# Altium PCB senoko_pvt1.PcbDoc (part 3 of 3)
Units mil, origin at the board's own origin, x right, y up, seen from the top; angles counter-clockwise.
Board outline 4901.58 x 1614.17 mil, 4 copper layers (Top Layer, Internal Plane 1, Internal Plane 2, Bottom Layer), stack 65.8 mil thick; 226 components, 139 nets, 941 pads, 366 vias.
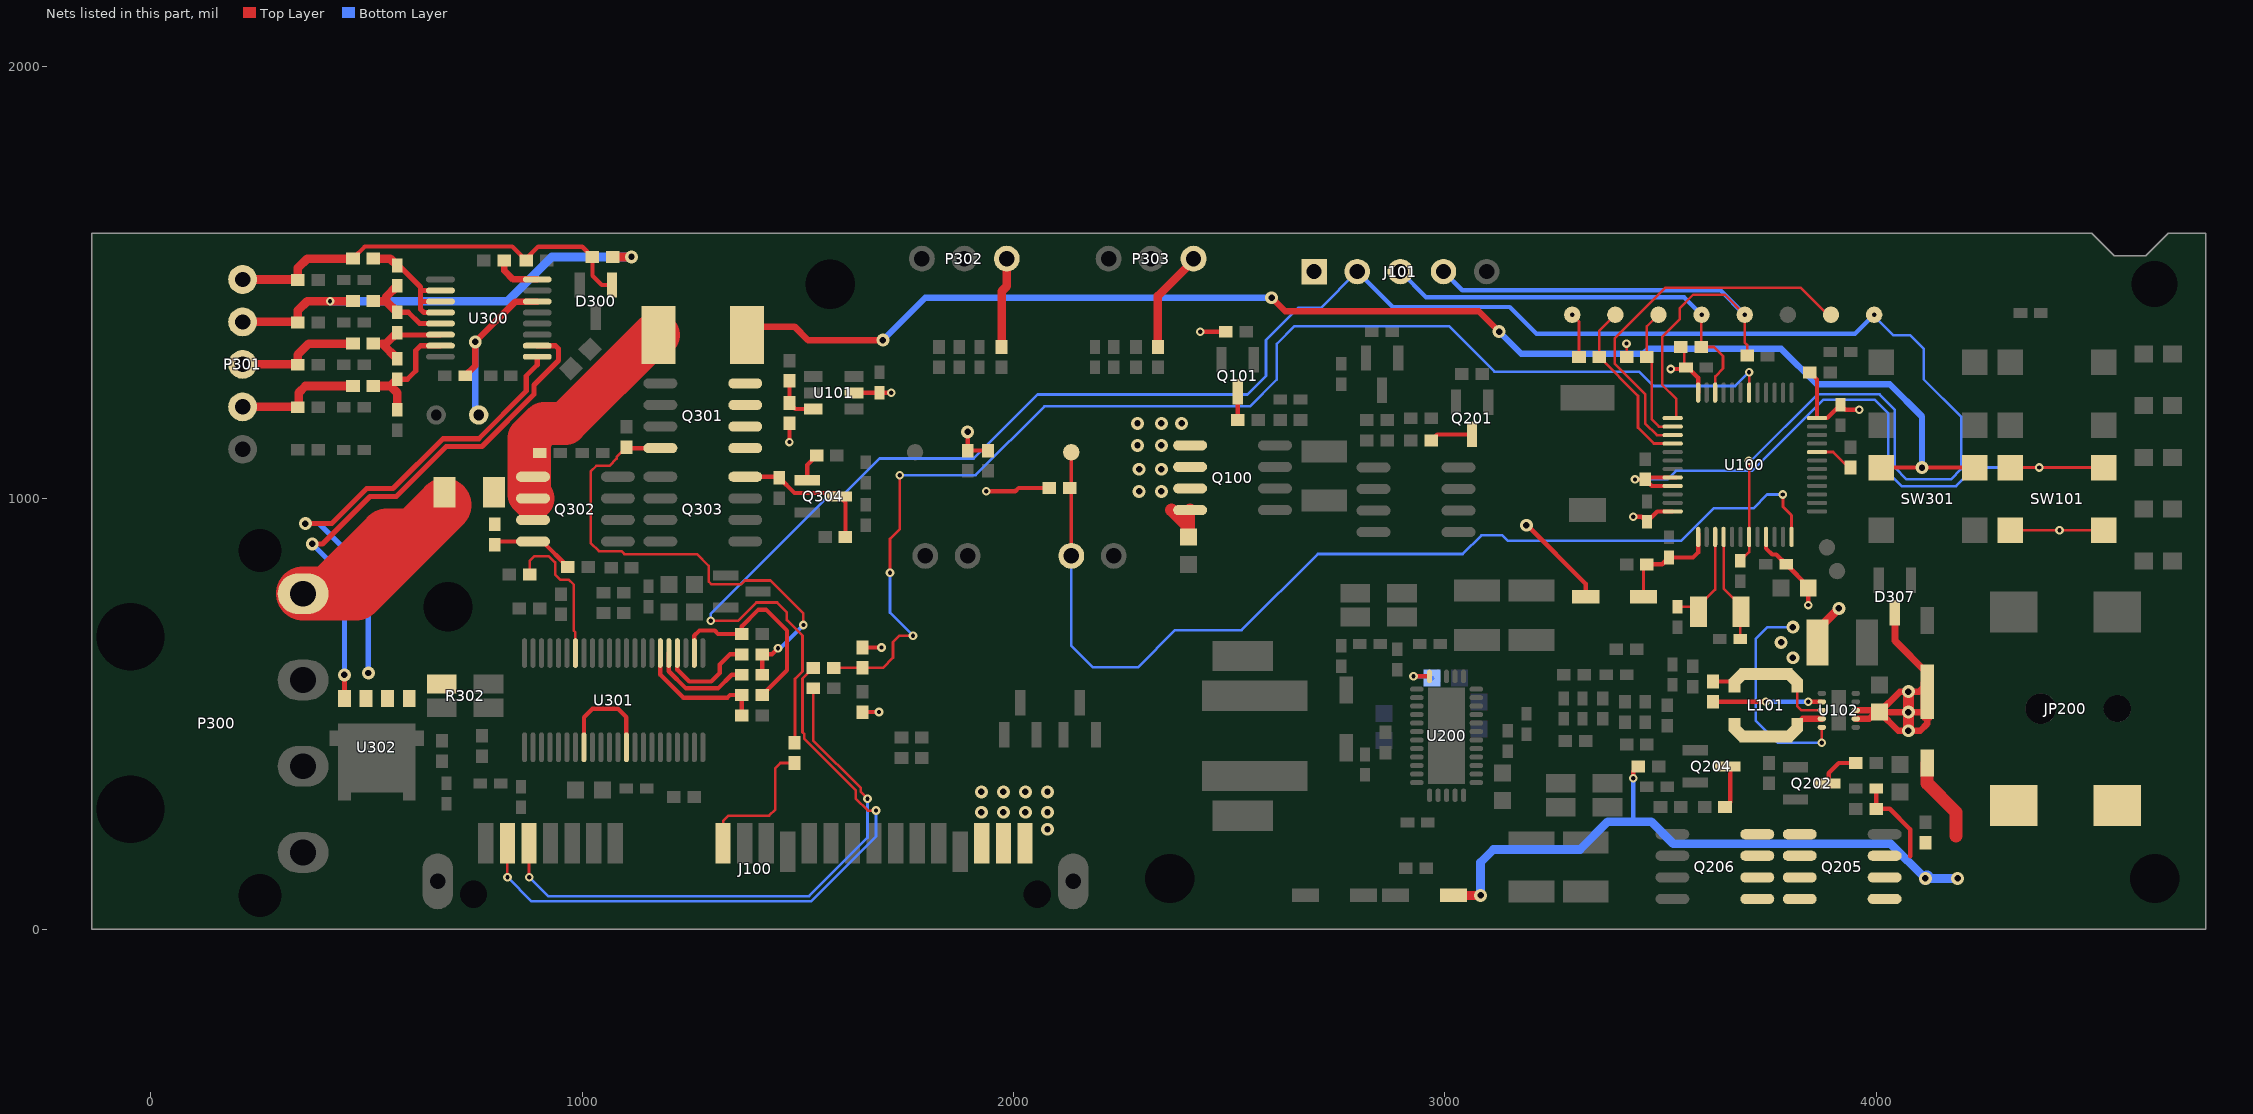
[diagram p5: the nets of this part, all layers, seen from the top]

## Via types
v1: diameter 20, hole 10, Top Layer to Bottom Layer, tented both sides, 200 vias
v2: diameter 30, hole 15, Top Layer to Bottom Layer, tented both sides, 156 vias
v3: diameter 25.98, hole 12.99, Top Layer to Bottom Layer, tented both sides, 10 vias

## Nets (pads, with @x,y where several pads share a name; then routed paths per layer and width w, separated by ;. In a path a pad name is that pad's centre, name@x,y a point inside that pad or via, vN(x,y) a via of type N, cw(c..) or ccw(c..) an arc to the next point about the centre after c; other vN are vias at no path point) (continued)
NetP302_3: P302.3 R336.2 | length 209.6
  Top Layer w20: R336.2@1972.44,1350.39 1972.44,1479.53 1984.25,1491.34 P302.3@1984.25,1555.12
NetP303_3: P303.3 R337.2 | length 237.8
  Top Layer w20: R337.2@2334.65,1350.39 2334.65,1468.5 P303.3@2419.29,1553.15
NetQ101_3: Q101.3 R105.1 | length 65
  Top Layer w10: R105.1@2519.69,1181.1 Q101.3@2519.69,1246.06
NetQ201_3: Q201.3 R201.2 | length 100.2
  Top Layer w10: R201.2@2968.5,1133.86 2982.28,1147.64 Q201.3@3062.99,1147.64
NetQ202_3: Q202.3 R205.2 | length 97.2
  Top Layer w10: Q202.3@3887.8,338.58 3889.76,340.55 3889.76,362.2 3913.39,385.83 R205.2@3952.76,385.83
NetQ204_3: Q204.3 R206.1 | length 107.4
  Top Layer w10: R206.1@3645.67,287.4 R206.1@3649.61,283.46 3661.42,295.28 3661.42,372.05 Q204.3@3655.51,377.95
NetQ205_5: Q205.5 Q205.6 Q205.7 Q205.8 Q206.5 Q206.6 Q206.7 Q206.8
NetQ301_5: Q301.5 Q301.6 Q301.7 Q301.8 R300.1 SW301.1 SW301.2 | length 3245
  Top Layer w10: SW301.2@4011.81,1070.87 SW301.1@4228.35,1070.87
  Top Layer w15: R300.1@1381.89,1377.95 1393.7,1377.95 1413.39,1397.64 1492.13,1397.64 1523.62,1366.14 v2(1696.85,1366.14) ; v2(2598.43,1464.57) 2629.92,1433.07 3078.74,1433.07 v2(3125.98,1385.83)
  Bottom Layer w15: v2(1696.85,1366.14) 1795.28,1464.57 v2(2598.43,1464.57) ; v2(3125.98,1385.83) 3177.17,1334.65 3460.63,1334.65 3472.44,1346.46 3779.53,1346.46 3862.2,1263.78 4031.5,1263.78 4106.3,1188.98 v2(4106.3,1070.87)
NetQ302_4: Q302.4 R303.2 R307.1 | length 197.1
  Top Layer w10: R303.2@797.24,891.73 804.92,899.41 908.09,899.41 966.54,840.96 R307.1@966.54,840.55
NetQ303_4: Q303.4 Q304.3 R304.1 R308.1 | length 337.5
  Top Layer w10: Q303.4@1377.95,1049.41 1454.53,1049.41 R304.1@1456.69,1047.24 1492.13,1011.81 1588.58,1011.81 Q304.3@1596.46,1003.94 1610.24,990.16 R308.1@1610.24,909.45
NetQ304_1: Q304.1 R311.1 | length 66.1
  Top Layer w10: Q304.1@1521.65,1041.34 1521.65,1076.77 R311.1@1543.31,1098.43
NetR116_2: R116.2 U100.20 | length 100.9
  Top Layer w6: U100.20@3854.98,1106.83 3900.06,1106.83 3936.02,1070.87 R116.2@3940.95,1070.87
NetR117_2: R117.2 R118.1 U101.6 | length 112
  Top Layer w10: R118.1@1480.31,1271.65 R117.2@1480.31,1220.47 1494.09,1206.69 U101.6@1535.43,1206.69
NetR319_2: R319.2 R322.2 U301.2 | length 490.7
  Top Layer w10: U301.2@1259.84,640.75 1259.84,681.1 1271.65,692.91 1307.09,692.91 1314.96,685.04 R319.2@1370.08,685.04 1370.08,702.93 1408.62,741.47 1426.02,741.47 1474.74,692.75 1474.74,600.72 R322.2@1417.32,543.31
NetR320_2: R320.2 U301.4 | length 237
  Top Layer w10: U301.4@1220.47,640.75 1220.47,602.36 1248.03,574.8 1299.21,574.8 1318.9,594.49 1318.9,614.17 1342.52,637.8 R320.2@1370.08,637.8
NetR321_2: R321.2 U301.5 | length 241.2
  Top Layer w10: U301.5@1200.79,640.75 1200.79,598.43 1240.41,558.8 1314.71,558.8 1346.46,590.55 R321.2@1370.08,590.55
NetR322_1: R322.1 R323.1 U301.6 | length 310.9
  Top Layer w10: U301.6@1181.1,640.75 1181.1,590.55 1234.25,537.4 1336.61,537.4 1342.52,543.31 R322.1@1370.08,543.31 R323.1@1370.08,496.06
NetR338_2: R338.2 U301.16 | length 342.3
  Top Layer w6: R338.2@877.95,822.83 877.95,854.33 889.08,865.46 922.24,865.46 937.01,850.69 937.01,822.83 948.82,811.02 968.5,811.02 980.32,799.21 980.32,692.91 984.25,688.98 U301.16@984.25,640.75
NetR339_1: R339.1 U300.16 | length 109
  Top Layer w15: R339.1@818.9,1551.18 818.9,1527.56 839.57,1506.89 U300.16@895.67,1506.89
NetU301_30: U301.30 U301.35 | length 254.5
  Top Layer w10: U301.30@1003.94,422.24 1003.94,492.13 1023.62,511.81 1082.68,511.81 1102.36,492.13 U301.35@1102.36,422.24
P2_CD: C309.1 J300.1 U300.14 | length 446.8
  Top Layer w15: C309.1@728.35,1283.46 751.97,1307.09 v2(751.97,1362.2) 845.47,1455.71 U300.14@895.67,1455.71
  Bottom Layer w15: v2(751.97,1362.2) 751.97,1208.66 J300.1@767.72,1192.91
P2_OUT: U300.10 U302.4 | length 1228.6
  Top Layer w12: v2(374.02,893.7) 397.64,893.7 507.87,1003.94 568.76,1003.94 684.62,1119.8 767.3,1119.8 888.08,1240.58 888.08,1262.09 944.88,1318.9 944.88,1346.46 937.99,1353.35 U300.10@895.67,1353.35 ; U302.4@448.62,535.24 v2(448.62,590.35)
  Bottom Layer w12: v2(374.02,893.7) 448.62,819.09 v2(448.62,590.35)
P2_PCKN: R302.2 U300.9 U302.1 U302.2 U302.3 | length 1154.6
  Top Layer w12: v2(358.27,940.94) 419.43,940.94 500.42,1021.94 561.31,1021.94 677.17,1137.8 759.84,1137.8 870.08,1248.03 870.08,1283.46 895.67,1309.06 U300.9@895.67,1327.76
  Bottom Layer w12: v2(358.27,940.94) 389.76,940.94 503.94,826.77 v2(503.94,594.49)
P2_VC1: C304.1 R306.2 U300.2 U300.3 U300.4 | length 330.2
  Top Layer w12: C304.1@570.87,1539.37 574.8,1539.37 625,1489.17 625,1481.3 ; U300.4@671.26,1430.12 632.87,1430.12 625,1437.99 625,1456.69 ; U300.3@671.26,1455.71 625.98,1455.71 625,1456.69 ; U300.2@671.26,1481.3 625,1481.3 ; 625,1456.69 625,1481.3
  Top Layer w20: R306.2@515.75,1555.12 555.12,1555.12 C304.1@570.87,1539.37
P2_VC2: C304.2 C306.1 R310.2 U300.5 | length 223.2
  Top Layer w12: C306.1@570.87,1431.1 596.46,1431.1 623.03,1404.53 U300.5@671.26,1404.53
  Top Layer w20: R310.2@515.75,1456.69 545.28,1456.69 ; C306.1@570.87,1431.1 545.28,1456.69 ; C304.2@570.87,1492.13 545.28,1466.54 545.28,1456.69
P2_VC3: C306.2 C308.1 R312.2 U300.6 | length 199.4
  Top Layer w12: C306.2@570.87,1383.86 576.77,1377.95 670.28,1377.95 U300.6@671.26,1378.94
  Top Layer w20: C308.1@570.87,1322.83 535.43,1358.27 545.28,1358.27 C306.2@570.87,1383.86
P2_VC4: C308.2 C311.1 R318.2 U300.7 | length 283.6
  Top Layer w12: C308.2@570.87,1275.59 594.49,1275.59 614.17,1295.28 614.17,1342.52 625,1353.35 U300.7@671.26,1353.35
  Top Layer w20: R318.2@515.75,1259.84 555.12,1259.84 ; C311.1@570.87,1204.72 570.87,1244.09 555.12,1259.84 ; C308.2@570.87,1275.59 555.12,1259.84
P3.3V_UC: C102.1 C103.1 C104.1 C112.2 C113.2 C115.1 C118.1 C222.1 D100.1 J101.1 L101.2 R102.1 R108.1 R109.2 R110.2 R111.2 R112.2 R113.2 R117.1 R119.2 R121.2 R225.1 R226.1 SW101.1 SW101.2 TP100.1 U100.9 U100.24 U100.36 U100.48 U101.2 U102.8 U102.10 U200.17 | length 2644.3
  Top Layer w6: v1(3295.28,1425.2) 3311.02,1409.45 R113.2@3311.02,1326.77 ; R112.2@3421.26,1326.77 v1(3421.26,1358.27) ; R111.2@3547.24,1350.39 3555.12,1342.52 C103.1@3555.12,1299.21 ; L101.2@3816.93,563.98 3816.93,517.72 3826.77,507.87 U102.8@3874.02,507.87 ; v1(3874.02,433.07) U102.10@3874.02,468.5 ; SW101.1@4311.02,925.2 v1(4425.2,925.2) SW101.2@4527.56,925.2
  Top Layer w10: v1@1479.33,1128.94 v1(1480.31,1129.92) R117.1@1480.31,1173.23 ; U101.2@1629.92,1244.09 C115.1@1688.98,1244.09 v1(1716.54,1244.09) ; R109.2@1649.61,503.94 v1(1687.99,503.94) ; R110.2@1649.61,653.54 v1(1693.9,653.54) ; R226.1@1893.7,1110.24 v2(1893.7,1153.54) ; R226.1@1901.57,1110.24 R225.1@1948.82,1110.24 ; v1(1937.01,1015.75) 2003.94,1015.75 2011.81,1023.62 R121.2@2082.68,1023.62 ; v1(2433.07,1385.83) R108.1@2492.13,1385.83 ; v1(2927.17,586.61) U200.17@2964.57,586.61 ; v2(3188.98,937.01) 3190.94,937.01 3326.77,801.18 D100.1@3326.77,771.65 D100.1@3337.6,771.65 ; v1(3437.01,956.69) 3456.69,956.69 C102.1@3468.5,944.88 3492.66,969.04 U100.48@3528.21,969.04 ; v1(3523.62,1299.21) C103.1@3555.12,1299.21 ; C103.1@3555.12,1303.15 C103.1@3559.06,1303.15 ; C103.1@3562.99,1303.15 3587.26,1278.88 U100.36@3587.26,1244.63 ; R102.1@3622.05,574.8 3660.43,574.8 L101.2@3671.26,563.98 ; U100.9@3744.75,917.86 3744.75,883.38 3758.86,869.27 3768.53,869.27 C112.2@3791.34,846.46 3842.52,795.28 C113.2@3842.52,791.34 v1(3842.52,751.97) ; R119.2@3846.46,1291.34 3862.85,1274.94 U100.24@3862.85,1185.58 3886.37,1185.58 C104.1@3917.32,1216.54 3929.13,1204.72 v1(3960.63,1204.72)
  Top Layer w20: C118.1@3864.17,665.35 3864.17,694.88 v2(3913.39,744.09)
  Bottom Layer w6: v2(3807.09,700.79) 3748.03,700.79 3720.47,673.23 3720.47,484.25 3771.65,433.07 v1(3874.02,433.07)
  Bottom Layer w10: v1(2927.17,586.61) 2966.54,586.61 C222.1@2970.47,582.68
  other v2: 3807.09,629.92 3779.53,665.35
PM_JRST: R113.1 TP101.1 U100.40 | length 417.8
  Top Layer w6: TP101.1@3395.28,1425.2 3358.27,1388.19 R113.1@3358.27,1326.77 3447.83,1237.2 3447.83,1163.39 3484.7,1126.52 U100.40@3536.08,1126.52
PM_JTCK: J101.4 R114.2 TP104.1 U100.37 | length 1304.2
  Top Layer w6: U100.37@3536.08,1185.57 3536.08,1230.65 3503.94,1262.8 3503.94,1374.02 3544.29,1414.37 3544.29,1439.96 3575.79,1471.46 3649.02,1471.46 v1(3695.28,1425.2) 3695.28,1360.83 3700.79,1355.32 R114.2@3700.79,1330.71
  Bottom Layer w10: J101.4@2996.85,1525.2 3040.32,1481.72 3638.75,1481.72 v1(3695.28,1425.2)
PM_JTDI: R112.1 TP102.1 U100.38 | length 321.6
  Top Layer w6: TP102.1@3495.28,1425.2 3468.5,1398.43 R112.1@3468.5,1326.77 3479.33,1315.94 3479.33,1183.07 3496.51,1165.89 U100.38@3536.08,1165.89
PM_JTDO: TP105.1 U100.39 | length 885.5
  Top Layer w6: U100.39@3536.08,1146.2 3491.59,1146.2 3464.57,1173.23 3464.57,1241.21 3393.7,1312.08 3393.7,1370.08 3511.81,1488.19 3824.65,1488.19 3887.64,1425.2 TP105.1@3895.28,1425.2
PM_JTMS: J101.3 R111.1 TP103.1 U100.34 | length 974.4
  Top Layer w6: v1(3595.28,1425.2) 3594.49,1424.41 R111.1@3594.49,1350.39 3624.02,1350.39 3644.98,1329.43 3644.98,1300.5 3626.97,1282.48 3626.97,1237.09 U100.34@3626.64,1236.76
  Bottom Layer w10: J101.3@2896.85,1525.2 2956.32,1465.72 3554.75,1465.72 v1(3595.28,1425.2)
PM_NRST: C114.1 J101.2 R103.1 TP106.1 U100.7 | length 5116.3
  Top Layer w6: v1(1298.23,715.55) 1361.22,715.55 1403.54,757.87 1451.77,757.87 1474.41,735.24 1474.41,717.22 1510.69,680.95 1510.69,598.52 1493.3,581.14 R103.1@1493.3,436.5 ; C114.1@3685.04,854.33 3705.37,874.66 U100.7@3705.37,909.99 ; v1(3704.72,1086.61) 3705.38,1085.96 U100.7@3705.38,917.86
  Bottom Layer w6: v1(1298.23,715.55) 1298.23,732.07 1573.23,1007.08 1604.52,1007.08 1689.35,1091.91 1907.34,1091.91 2055.58,1240.16 2541.94,1240.16 2585.25,1283.46 2585.25,1366.24 2659.96,1440.94 2712.6,1440.94 J101.2@2796.85,1525.2 ; v1(3704.72,1086.61) 3709.85,1086.61 3863.59,1240.35 4007.69,1240.35 4043.31,1204.72 4043.31,1070.87 4070.87,1043.31 4173.23,1043.31 4196.85,1066.93 4196.85,1188.98 4110.24,1275.59 4110.24,1346.46 4078.74,1377.95 4039.37,1377.95 3995.28,1422.05 v1(3995.28,1425.2)
  Bottom Layer w10: J101.2@2796.85,1525.2 2879.13,1442.91 3150.59,1442.91 3212.6,1380.91 3950.98,1380.91 v1(3995.28,1425.2)
PM_OSC32_IN: C110.1 U100.3 Y100.2 | length 233.6
  Top Layer w6: C110.1@3539.37,748.03 3586.61,748.03 3626.64,788.05 U100.3@3626.64,917.86
PM_OSC32_OUT: C111.1 U100.4 Y100.1 | length 262.3
  Top Layer w6: U100.4@3646.32,917.86 3646.32,790.69 3687.01,750 Y100.1@3687.01,736.22 3687.01,732.28 3685.04,730.31 C111.1@3685.04,673.23
PM_REFLASH_ALRT: R106.2 SW101.3 SW101.4 U100.44 U100.45 | length 1591
  Top Layer w6: SW101.3@4311.02,1070.87 SW101.4@4527.56,1070.87
  Top Layer w10: v1(3440.94,1043.31) 3461.61,1043.31 3464.57,1040.35 R106.2@3464.57,1043.31 ; U100.45@3536.08,1028.09 3479.78,1028.09 R106.2@3464.57,1043.31 ; U100.44@3536.08,1047.78 3469.04,1047.78 R106.2@3464.57,1043.31
  Bottom Layer w6: v1(3440.94,1043.31) 3515.75,1043.31 3535.43,1062.99 3712.6,1062.99 3877.95,1228.35 3996.06,1228.35 4027.56,1196.85 4027.56,1059.06 4059.06,1027.56 4185.04,1027.56 4228.35,1070.87 v1(4377.95,1070.87)
PM_TO_HOST_UART: R100.1 R110.1 U100.30 | length 2926.6
  Top Layer w6: R100.1@1582.68,606.3 R110.1@1649.61,606.3 1696.85,606.3 1720.47,629.92 1720.47,666.34 1735.24,681.1 v1(1766.73,681.1) ; v1(1713.58,826.77) 1713.58,905.51 1736.22,928.15 v1(1736.22,1053.15) ; U100.30@3705.38,1236.76 v1(3705.38,1291.99)
  Bottom Layer w6: v1(1713.58,826.77) 1713.58,734.25 v1(1766.73,681.1) ; v1(1736.22,1053.15) 1912.16,1053.15 2071.61,1212.6 2548.33,1212.6 2610.24,1274.51 2610.24,1357.28 2651.57,1398.62 3009.84,1398.62 3115.16,1293.31 3449.8,1293.31 3483.27,1259.84 3673.23,1259.84 v1(3705.38,1291.99)
PM_VBAT: C109.1 D100.2 R107.2 U100.1 | length 252.1
  Top Layer w6: D100.2@3460.63,771.65 3460.63,838.58 R107.2@3468.5,846.46
  Top Layer w10: R107.2@3468.5,846.46 3503.94,846.46 C109.1@3519.69,862.2 3575.45,862.2 3587.27,874.02 U100.1@3587.27,917.86
PN_NRST_CN: J100.15 R103.2 | length 329.1
  Top Layer w6: J100.15@1326.57,199.8 1326.57,251.77 1338.58,263.78 1433.07,263.78 1447.69,278.4 1447.69,374.02 1459.5,385.83 R103.2@1492.13,385.83
PWR_TO_HOST: C101.1 J100.1 J100.2 J100.3 Q100.5 Q100.6 Q100.7 Q100.8 | length 120.1
  Top Layer w30: 2366.14,972.44 2405.51,933.07 ; C101.1@2405.51,909.45 2405.51,933.07 ; Q100.8@2409.45,972.24 2405.51,968.31 2405.51,933.07
  other v2: 2078.74,232.28 1925.2,271.65 1976.38,271.65 2027.56,271.65 2078.74,271.65 1925.2,318.9 1976.38,318.9 2027.56,318.9 2078.74,318.9 2291.34,1015.75 2342.52,1015.75 2291.34,1066.93 2342.52,1066.93 2287.4,1122.05 2342.52,1122.05 2287.4,1173.23 2342.52,1173.23 2389.76,1173.23
RAW_ACIN: C204.2 D101.1 D201.1 JP200.1 Q205.1 Q205.2 Q205.3 R208.1 R213.1 R214.1 | length 1907.3
  Top Layer w10: v1(3437.01,350.39) 3437.01,366.14 R214.1@3448.82,377.95 ; C204.2@4000,326.77 R208.1@4000,279.53 4031.5,279.53 4078.74,232.28 4078.74,169.29
  Top Layer w20: D201.1@3019.69,78.74 v2(3082.68,78.74)
  Top Layer w30: D101.1@4118.11,362.2 4118.11,338.58 ; D101.1@4118.11,385.83 4118.11,338.58 ; 4185.04,216.54 4185.04,271.65 4118.11,338.58
  Bottom Layer w10: 3437.01,250 v1(3437.01,350.39)
  Bottom Layer w20: v2(3082.68,78.74) 3082.68,155.29 3112.71,185.33 3313.28,185.33 3377.95,250 3437.01,250 3478.35,250 3529.53,198.82 4033.46,198.82 v2(4114.17,118.11) v2(4188.98,118.11)
  Bottom Layer w30: v2(4114.17,118.11) v2@4118.11,122.05
SATA_A+: J100.21 R100.2 | length 1501.6
  Top Layer w6: J100.21@826.57,199.8 826.57,121.26 v1(826.77,121.06) ; R100.2@1535.43,606.3 1510.68,581.55 1510.68,456.77 1514.91,452.55 1514.91,441.79 1633.86,322.83 1633.86,303.84 1662.11,275.59 v1(1681.1,275.59)
  Bottom Layer w6: v1(826.77,121.06) 882.87,64.96 1530.67,64.96 1681.1,215.39 v1(1681.1,275.59)
SATA_A-: J100.20 R101.2 | length 1336.4
  Top Layer w6: J100.20@876.57,199.8 876.57,121.46 v1(876.97,121.06) ; R101.2@1535.43,559.06 1535.43,438.23 1645.86,327.81 1645.86,318.71 v1(1661.42,303.15)
  Bottom Layer w6: v1(876.97,121.06) 921.07,76.96 1525.7,76.96 1661.42,212.68 v1(1661.42,303.15)
TPS_PG: R102.2 U102.7 | length 252
  Top Layer w10: R102.2@3622.05,527.56 v1(3744.09,527.56) ; v1(3842.52,527.56) U102.7@3874.02,527.56
  Bottom Layer w10: v1(3744.09,527.56) v1(3842.52,527.56)
TPS_SW: L101.1 U102.9 | length 62.4
  Top Layer w15: L101.1@3816.93,475.39 3829.72,488.19 U102.9@3874.02,488.19
UC_BOOTSTRAP: C117.1 D101.2 D307.3 D308.2 U102.2 U102.3 | length 876.1
  Top Layer w15: U102.2@3952.76,488.19 3984.25,488.19 4003.94,507.87 U102.3@3952.76,507.87 ; D308.2@4118.11,590.55 D308.2@4118.11,582.68 4118.11,570.87 4098.43,551.18 v2(4074.8,551.18) 4055.12,551.18 C117.1@4007.87,503.94 ; C117.1@4007.87,503.94 v2(4074.8,503.94) 4110.24,503.94 4118.11,496.06 4118.11,476.38 4102.36,460.63 v2(4074.8,460.63) 4051.18,460.63 C117.1@4007.87,503.94
  Top Layer w16: D307.3@4043.31,734.25 4043.31,669.29 4118.11,594.49 D308.2@4118.11,590.55
  Top Layer w25: v2(4074.8,460.63) v2(4074.8,551.18)
  Top Layer w30: D101.2@4118.11,496.06 D308.2@4118.11,570.87
USART2_TX_ADC2: J103.1 P102.1 R121.1 U100.12 | length 2394.7
  Top Layer w7: v1(3783.46,1008.41) 3783.46,980.31 3803.8,959.98 U100.12@3803.8,917.86
  Top Layer w8: P102.1@2133.86,866.14 J103.1@2133.86,1106.3
  Bottom Layer w6: P102.1@2133.86,866.14 2133.86,657.48 2183.77,607.57 2288.67,607.57 2374.81,693.71 2528.62,693.71 2705.33,870.42 3041.2,870.42 3084.55,913.76 3133.48,913.76 3146.24,901.01 3547.9,901.01 3623.08,976.19 3715.12,976.19 3747.34,1008.41 v1(3783.46,1008.41)
VBAT: F300.1 P300.1 | length 667.6
  Top Layer w125: P300.1@352.76,778.35 412.2,778.35 ; F300.1@681.1,984.25 610.24,913.39 ; 412.2,778.35 475.2,778.35 610.24,913.39 ; 412.2,778.35 547.24,913.39 610.24,913.39
VBAT_2: C300.2 F300.2 Q302.1 Q302.2 Q302.3 R300.2 R303.1 | length 542.5
  Top Layer w100: Q302.2@885.83,999.41 877.07,1008.17 877.07,1139.34 910.96,1173.23 960.63,1173.23 1165.35,1377.95 R300.2@1177.17,1377.95
VC1: D300.1 P301.1 R305.2 R306.1 R309.1 R313.1 | length 996.3
  Top Layer w10: R306.1@468.5,1555.12 468.5,1555.93 496.06,1583.49 837.77,1583.49 R309.1@870.08,1551.18 870.08,1555.12 897.64,1582.68 1000,1582.68 R305.2@1023.62,1559.06 1023.62,1515.75 1045.28,1494.09 D300.1@1068.9,1494.09
  Top Layer w20: P301.1@212.6,1506.89 339.57,1506.89 R313.1@340.55,1505.91 340.55,1533.46 362.2,1555.12 R306.1@468.5,1555.12
VC2: P301.2 R305.1 R310.1 R314.1 | length 1077.4
  Top Layer w20: P301.2@212.6,1408.46 339.57,1408.46 R314.1@340.55,1407.48 340.55,1435.04 362.2,1456.69 v1(415.35,1456.69) R310.1@468.5,1456.69 ; R305.1@1070.87,1559.06 v2(1114.17,1559.06)
  Bottom Layer w20: v1(415.35,1456.69) 826.77,1456.69 929.13,1559.06 v2(1114.17,1559.06)
VC3: P301.3 R312.1 R315.1 | length 290.5
  Top Layer w20: P301.3@212.6,1310.04 339.57,1310.04 R315.1@340.55,1309.06 340.55,1332.68 366.14,1358.27 R312.1@468.5,1358.27
VC4: P301.4 R316.1 R318.1 | length 295.1
  Top Layer w20: P301.4@212.6,1211.61 339.57,1211.61 R316.1@340.55,1210.63 342.52,1212.6 342.52,1244.09 358.27,1259.84 R318.1@468.5,1259.84
ZVCHG: Q301.4 R301.1 R320.1 R321.1 | length 1141.1
  Top Layer w6: R301.1@1102.36,1118.11 1079.72,1095.47 1079.72,1091.54 1062.99,1074.8 1032.48,1074.8 1019.69,1062.01 1019.69,895.67 1038.39,876.97 1090.62,876.97 1097.51,870.08 1265.75,870.08 1293.31,842.52 1293.31,806.17 1299.42,800.06 1367.97,800.06 1376.97,809.06 1435.96,809.06 1512.8,732.22 v1(1512.8,705.71)
  Top Layer w10: R301.1@1102.36,1118.11 1104.53,1115.94 Q301.4@1181.1,1115.94 ; R321.1@1417.32,590.55 R320.1@1417.32,637.8 1439.96,637.8 v1(1453.74,651.57)
  Bottom Layer w10: v1(1453.74,651.57) 1458.66,651.57 v1(1512.8,705.71)
pads on no net: D300.2 D301.2 D307.2 J100.0 J100.7 J100.8 J100.9 JP200.0 P300.0 P300.4 U100.2 U100.5 U100.6 U100.11 U100.13 U100.15 U100.19 U100.26 U100.41 U100.42 U100.43 U100.46 U300.1 U300.11 U300.15 U301.12 U301.17 U301.19

## Polygon pours and split planes (outlines as drawn)
GND on Top Layer "bottom - GND" (solid, remove dead copper, pour order 4): 3561.02,-126.97 4703.74,-126.97 4896.65,65.94 4896.65,1653.54 4794.29,1755.91 64.96,1755.91 -275.59,1645.67 -299.21,-86.61 29.53,-176.18 74.8,-130.91 3617.13,-130.91
GND on Bottom Layer "bottom - GND" (solid, remove dead copper, pour order 2): 4404.53,1717.52 54.13,1717.52 -228.35,1669.29 -204.72,-78.74 36.42,-120.08 4758.86,-120.08 4913.39,34.45 4913.39,1573.82 4773.62,1713.58 4375.98,1713.58
GND on Internal Plane 1 (split plane): 3431.95,564.26 3431.95,545 3426.46,539.51 3411.14,539.51 3403.68,546.96 3403.68,561.3 3412.12,569.74 3426.46,569.74
GND on Internal Plane 1 (split plane): 3229.19,510.12 3229.19,494.8 3217.8,483.41 3208.38,483.41 3196.01,495.78 3196.01,507.17 3204.3,515.47 3223.85,515.47
GND on Internal Plane 1 (split plane): 3007.73,695.16 3007.73,647.64 3007.73,607.99 2957.75,558 2956.86,556.68 2956.55,555.12 2956.55,390.75 2956.86,389.19 2957.75,387.86 2969.56,376.05 2970.88,375.17 2972.44,374.86 2987.48,374.86 3000.84,361.5 3000.84,339.29 2990.44,328.88 2785.15,328.88 2726.52,387.52 2726.52,452.76 2726.52,572.13 2869.8,715.41 2987.48,715.41
GND on Internal Plane 1 (split plane): 1477.22,714.85 1477.22,486.93 1441.22,450.93 1368.11,450.93 1366.55,450.62 1365.23,449.73 1192.21,276.72 1131.61,276.72 1076.7,331.62 1075.38,332.51 1073.82,332.82 719.49,332.82 717.93,332.51 716.6,331.62 650.87,265.89 609.96,265.89 599.55,276.3 599.55,326.07 720.19,446.71 803.15,446.71 803.47,446.77 848.43,446.77 849.96,447.08 851.26,447.95 876.85,473.54 877.72,474.84 878.03,476.38 878.03,519.9 910.15,552.02 1029.53,552.02 1031.09,552.33 1032.41,553.22 1091.47,612.27 1091.91,612.94 1092.35,613.6 1092.66,615.16 1092.66,809.33 1140.47,857.14 1334.92,857.14
GND on Internal Plane 1 (split plane): 4743.68,20.1 -117.7,20.1 -117.7,1594.08 4491.68,1594.08 4537.95,1547.8 4541,1545.3 4544.47,1543.44 4548.24,1542.3 4552.17,1541.91 4625,1541.91 4628.92,1542.3 4632.69,1543.44 4636.17,1545.3 4639.21,1547.8 4685.49,1594.08 4743.68,1594.08
no net on Internal Plane 2 (split plane): 3897.56,443.22 3897.56,422.92 3888.1,413.46 3863.87,413.46 3854.41,422.92 3854.41,443.22 3863.87,452.68 3888.1,452.68
CHG_SYS on Internal Plane 2 (split plane): 2853.42,1018.77 2854.08,1018.33 2854.74,1017.89 2856.3,1017.57 2856.3,1017.58 3050.48,1017.58 3229.4,838.65 3230.06,838.21 3230.72,837.77 3232.28,837.46 3328.04,837.46 3358.13,807.37 3358.13,685.04 3358.44,683.48 3359.32,682.16 3390.61,650.87 3390.61,587.32 3349.48,546.19 3348.59,544.87 3348.28,543.31 3348.28,402.56 3348.59,401 3349.48,399.68 3446.71,302.44 3446.71,194.6 3428.43,176.32 3109.25,176.32 3107.69,176.01 3106.37,175.13 3066.22,134.98 2974.13,134.98 2930.26,178.85 2930.26,294.57 2950.72,315.03 2951.16,315.69 2951.6,316.35 2951.91,317.91 2951.91,591.54 2951.6,593.1 2950.72,594.42 2937.92,607.21 2936.6,608.1 2935.04,608.41 2823.54,608.41 2555.26,876.69 2555.26,974.69 2657.2,1076.63 2795.55,1076.63
PWR_TO_HOST on Internal Plane 2 (split plane): 2458.52,1158.74 2458.52,882.59 2177.23,601.31 2176.35,599.99 2176.04,598.43 2176.04,598.42 2176.04,282.2 2098.7,204.87 1908.19,204.87 1902.7,210.35 1902.7,454.02 1961.55,512.86 1962.43,514.19 1962.74,515.75 1962.74,1081.97 2090.27,1209.5 2407.76,1209.5
P3.3V_UC on Internal Plane 2 (split plane): 4743.68,20.1 -117.7,20.1 -117.7,1594.08 4491.68,1594.08 4537.95,1547.8 4541,1545.3 4544.47,1543.44 4548.24,1542.3 4552.17,1541.91 4625,1541.91 4628.92,1542.3 4632.69,1543.44 4636.17,1545.3 4639.21,1547.8 4685.49,1594.08 4743.68,1594.08

## Keep-outs
Keep-Out Layer:
  the board outline again, w39.37
  text "Route board on centerline of this outline" at 3866.14,-122.05 h30

## Other copper
Top Layer:
  rectangle net P2_PCKN: 484.25,547.24 653.54,614.17
  rectangle net BAT_PGND: 354.33,314.96 484.25,480.32
  rectangle net NetL200_2: 2464.57,555.12 2598.43,614.17
  rectangle net VBAT_2: 795.28,937.01 874.02,1062.99
  rectangle net NetD301_1: 1094.49,885.83 1169.29,1062.99
  rectangle net NetD301_1: 1200.79,885.83 1307.09,1062.99
  rectangle net NetD301_1: 1232.28,1059.06 1307.09,1275.59
  rectangle net NetD301_1: 1181.1,1157.48 1271.65,1275.59
  rectangle net NetQ301_5: 1350.39,1106.3 1440.94,1444.88
  rectangle net GND: 724.41,543.31 870.08,649.61
  rectangle net GND: 826.77,496.06 917.32,594.49
  rectangle net GND: 787.4,606.3 870.08,700.79
  rectangle net BAT_PROTECTED: 1377.95,885.83 1527.56,1000
  rectangle net RAW_ACIN: 4263.78,106.3 4523.62,326.77
  rectangle net NetQ205_5: 3724.41,59.06 3826.77,232.28
  rectangle net CHG_SYS: 3200.79,181.1 3326.77,271.65
  rectangle net CHG_SYS: 3161.42,216.54 3224.41,381.89
  rectangle net CHG_SYS: 3082.68,354.33 3118.11,401.57
  rectangle net CHG_SYS: 3114.17,338.58 3192.91,381.89
  rectangle net GND: 3106.3,27.56 3417.32,165.35
  rectangle net CHG_SW: 2460.63,279.53 2935.04,379.92
  rectangle net CHG_SW: 2917.32,279.53 2988.19,307.09
  rectangle net BAT_PROTECTED: 3027.56,779.53 3122.05,1082.68
  rectangle net BAT_PROTECTED: 2866.14,771.65 3255.91,842.52
  rectangle net CHG_SYS: 2625.98,959.65 2830.71,1070.87
  rectangle net CHG_SYS: 2625.98,960.63 2653.54,1082.68
  rectangle net PWR_TO_HOST: 2267.72,960.63 2409.45,1196.85
  rectangle net GND: 3015.75,633.86 3334.65,740.16
  rectangle net GND: 3098.43,598.43 3228.35,653.54
  rectangle net GND: 1759.84,220.47 1893.7,346.46
  rectangle net GND: 1456.69,220.47 1594.49,346.46
  rectangle net PWR_TO_HOST: 1909.45,216.54 2098.43,338.58
  rectangle net GND: 4208.66,673.23 4677.17,822.83
  rectangle net GND: 2998.03,240.16 3153.54,318.9
  rectangle net GND: 3070.87,301.18 3107.28,346.46
  rectangle net GND: 2998.03,207.68 3139.76,249.02
  rectangle net GND: 2998.03,311.02 3074.8,346.46
  rectangle net CHG_SYS: 2644.69,903.54 2785.43,990.16
  rectangle net CHG_SYS: 2565.94,903.54 2652.56,971.46
  rectangle net P3.3V_UC: 3763.78,578.74 3842.52,716.54
  rectangle net RAW_ACIN: 4019.69,51.18 4523.62,188.98
  rectangle net RAW_ACIN: 4145.67,173.23 4279.53,244.09
  rectangle net NetC205_2: 3393.7,220.47 3515.75,303.15
  rectangle net NetC205_2: 3433.07,98.43 3515.75,240.16
  pour cut-out: 2931.1,716.54 2869.09,716.54 2721.46,568.9 2721.46,379.92 2781.5,319.88 3459.65,319.88 3569.88,430.12 3569.88,596.46 3553.15,613.19 3260.83,613.19 3231.3,583.66 3045.28,583.66 3004.92,624.02 3004.92,699.8 2985.24,719.49 2983.27,717.52 2913.39,717.52
  pour cut-out: 594.49,274.61 609.25,259.84 686.02,259.84 709.65,283.46 1277.56,283.46 1474.41,480.32 1474.41,714.57 1332.68,856.3 1134.84,856.3 1080.71,802.17 1080.71,606.3 1037.4,562.99 964.57,562.99 945.87,544.29 945.87,500.98 924.21,479.33 645.67,479.33 594.49,428.15
  pour cut-out: 1161.42,1574.8 1161.42,1523.62 1299.21,1523.62 1299.21,1574.8
  text "1" at 1173.23,1535.43 h30
Bottom Layer:
  pour cut-out: 3500,330.71 3573.82,404.53 3573.82,593.5 3556.1,611.22 3398.62,611.22 3367.13,579.72 3105.31,579.72 3003.94,681.1 3003.94,699.8 2986.22,717.52 2878.94,717.52 2724.41,562.99 2724.41,378.94 2772.64,330.71
  pour cut-out: 1326.77,857.28 1134.84,857.28 933.07,655.51 933.07,503.94 905.51,476.38 649.61,476.38 589.57,416.34 589.57,279.53 611.22,257.87 683.07,257.87 708.66,283.46 1266.73,283.46 1476.38,493.11 1476.38,713.58 1333.66,856.3 1320.87,856.3
  pour cut-out: 1161.42,1523.62 1299.21,1523.62 1299.21,1574.8 1161.42,1574.8
  text "4" at 1267.72,1535.43 h30
Internal Plane 1 (plane layer: these items are gaps in the copper):
  rectangle: 1161.42,1523.62 1188.98,1574.8
  rectangle: 1224.41,1523.62 1299.21,1574.8
  lines w7.87: 803.15,450.79 848.43,450.79 874.02,476.38 874.02,521.65
  lines w8: 803.15,450.79 718.5,450.79 595.47,327.76 595.47,274.61 608.27,261.81 652.56,261.81 719.49,328.74 982.28,328.74 1073.82,328.74 1129.92,272.64 1193.9,272.64 1368.11,446.85 1442.91,446.85 1481.3,485.24 1481.3,716.54 1336.61,861.22 1138.78,861.22 1088.58,811.02 1088.58,615.16 1029.53,556.1 908.46,556.1 874.02,521.65 ; 2722.44,385.83 2722.44,452.76 2722.44,573.82 2868.11,719.49 2989.17,719.49 3011.81,696.85 3011.81,647.64 3011.81,606.3 2960.63,555.12 2960.63,390.75 2972.44,378.94 2989.17,378.94 3004.92,363.19 3004.92,337.6 2992.13,324.8 2948.82,324.8 2783.46,324.8 2722.44,385.83 ; 3191.93,494.09 3206.69,479.33 3219.49,479.33 3233.27,493.11 3233.27,511.81 3225.54,519.54 3202.61,519.54 3191.93,508.86 3191.93,494.09 ; 3399.61,545.28 3409.45,535.43 3428.15,535.43 3436.02,543.31 3436.02,565.94 3428.15,573.82 3410.43,573.82 3399.61,562.99 3399.61,545.28
  text "2" at 1196.85,1535.43 h30
Internal Plane 2 (plane layer: these items are gaps in the copper):
  rectangle: 1161.42,1523.62 1224.41,1574.8
  rectangle: 1259.84,1523.62 1299.21,1574.8
  lines w7.87: 3850.39,421.26 3862.2,409.45 3889.76,409.45 3901.57,421.26 3901.57,444.88 3889.76,456.69 3862.2,456.69 3850.39,444.88 3850.39,421.26
  lines w8: 3034.45,1021.65 3052.17,1021.65 ; 3052.17,1021.65 2856.3,1021.65 2797.24,1080.71 2655.51,1080.71 2551.18,976.38 2551.18,875 2821.85,604.33 2935.04,604.33 2947.83,591.54 2947.83,317.91 2926.18,296.26 2926.18,177.17 2972.44,130.91 3067.91,130.91 3109.25,172.24 3191.93,172.24 3430.12,172.24 3450.79,192.91 3450.79,304.13 3352.36,402.56 3352.36,543.31 3394.69,585.63 3394.69,652.56 3362.2,685.04 3362.2,809.06 3329.72,841.54 3232.28,841.54 3052.17,1021.65 ; 1898.62,208.66 1898.62,455.71 1958.66,515.75 1958.66,1083.66 2088.58,1213.58 2409.45,1213.58 2462.6,1160.43 2462.6,880.91 2180.12,598.43 2180.12,280.51 2100.39,200.79 1906.5,200.79 1898.62,208.66
  text "3" at 1232.28,1535.43 h30

## Silkscreen, mask and mechanical layers (free items; w line width, h text height)
Top Overlay:
  text "Designed in" at 1413.39,1685.04 h30
  text "Sutajio Ko-Usagi Pte Ltd" at 1275.59,1681.1 h30
  text "Singapore" at 1397.64,1681.1 h30
  text "07/14" at 1692.91,1681.1 h30
  text "Battery Board" at 1314.96,1677.17 h40
  text "PVT1-A" at 1559.06,1677.17 h30
  text "Senoko" at 1330.71,1669.29 h40
  text "-" at 1775.59,1417.32 h31.5
  text "T" at 1874.02,1417.32 h31.5
  text "X" at 1972.44,1417.32 h31.5
  text "-" at 2208.66,1417.32 h31.5
  text "T" at 2311.02,1417.32 h31.5
  text "X" at 2409.45,1417.32 h31.5
  text "on/off" at 4031.5,1358.27 h35.43
  text "level" at 4346.46,1358.27 h35.43
  text "-" at 653.54,1145.67 h20
  text "+" at 751.97,1145.67 h20
  text "CD CLR" at 633.86,1110.24 h28
  text "DAC" at 1803.15,948.82 h30
  text "ADC" at 2145.67,948.82 h30
  text "prime" at 4039.37,854.33 h35.43
  text "reflash" at 4307.09,846.46 h35.43
  text "+" at 1783.46,736.22 h31.5
  text "-" at 1881.89,736.22 h31.5
  text "+" at 2122.05,736.22 h31.5
  text "-" at 2220.47,736.22 h31.5
Bottom Overlay:
  circle w5: c1725.71,1864.17 r22.96
  rectangle: 3830.71,1062.99 4409.45,1255.91
  text "c bunnie@kosagi.com" at 1736.22,1854.33 h30
  text "CC3.0-BY-SA + XL1.0" at 1748.03,1795.28 h30
  text "S/N:" at 4535.43,1216.54 h30
Mechanical 2:
  lines w3.94: -137.8,0 -137.8,1377.95
Mechanical 3:
  lines w5: 5155.59,-148.28 5205.59,-198.28 ; 5155.59,2001.72 5205.59,2051.72 ; 5255.59,-148.28 5205.59,-198.28 ; 5255.59,2001.72 5205.59,2051.72 ; 6155.59,-48.28 7805.59,-48.28 ; 6155.59,551.72 7805.59,551.72 7705.59,451.72 ; 6155.59,1401.72 7805.59,1401.72 7705.59,1301.72 ; 6155.59,1901.72 7805.59,1901.72 ; 6205.59,451.72 6305.59,551.72 ; 6205.59,1301.72 6305.59,1401.72 ; 6255.59,1.72 6305.59,-48.28 ; 6255.59,451.72 6355.59,551.72 ; 6255.59,551.72 6155.59,451.72 7805.59,451.72 ; 6255.59,1301.72 6355.59,1401.72 ; 6255.59,1401.72 6155.59,1301.72 7805.59,1301.72 ; 6255.59,1851.72 6305.59,1901.72 ; 6305.59,451.72 6405.59,551.72 ; 6305.59,1301.72 6405.59,1401.72 ; 6355.59,1.72 6305.59,-48.28 ; 6355.59,1851.72 6305.59,1901.72 ; 6405.59,451.72 6505.59,551.72 ; 6405.59,1301.72 6505.59,1401.72 ; 6455.59,451.72 6555.59,551.72 ; 6455.59,1301.72 6555.59,1401.72 ; 6505.59,451.72 6605.59,551.72 ; 6505.59,1301.72 6605.59,1401.72 ; 6586.73,1952.43 6636.73,2002.43 ; 6605.59,451.72 6705.59,551.72 ; 6605.59,1301.72 6705.59,1401.72 ; 6636.73,1902.43 6736.73,2002.43 ; 6655.59,451.72 6755.59,551.72 ; 6655.59,1301.72 6755.59,1401.72 ; 6686.73,1902.43 6736.73,1952.43 ; 6686.73,2002.43 6586.73,1902.43 6586.73,2002.43 6736.73,2002.43 ; 6705.59,451.72 6805.59,551.72 ; 6705.59,1301.72 6805.59,1401.72 ; 6736.73,1902.43 6736.73,2002.43 ; 6755.59,451.72 6855.59,551.72 ; 6755.59,1301.72 6855.59,1401.72 ; 6846.57,1952.43 6896.57,2002.43 ; 6855.59,451.72 6955.59,551.72 ; 6855.59,1301.72 6955.59,1401.72 ; 6896.57,1902.43 6996.57,2002.43 ; 6905.59,451.72 7005.59,551.72 ; 6905.59,1301.72 7005.59,1401.72 ; 6946.57,1902.43 6996.57,1952.43 ; 6946.57,2002.43 6846.57,1902.43 6846.57,2002.43 6996.57,2002.43 ; 6955.59,451.72 7055.59,551.72 ; 6955.59,1301.72 7055.59,1401.72 ; 6996.57,1902.43 6996.57,2002.43 ; 7005.59,451.72 7105.59,551.72 ; 7005.59,1301.72 7105.59,1401.72 ; 7105.59,451.72 7205.59,551.72 ; 7105.59,1301.72 7205.59,1401.72 ; 7155.59,451.72 7255.59,551.72 ; 7155.59,1301.72 7255.59,1401.72 ; 7305.59,451.72 7405.59,551.72 ; 7305.59,1301.72 7405.59,1401.72 ; 7355.59,451.72 7455.59,551.72 ; 7355.59,1301.72 7455.59,1401.72 ; 7505.59,-98.28 7555.59,-48.28 ; 7505.59,-48.28 7505.59,-148.28 ; 7505.59,451.72 7605.59,551.72 ; 7505.59,1301.72 7605.59,1401.72 ; 7505.59,1951.72 7555.59,2001.72 ; 7555.59,-148.28 7655.59,-48.28 7655.59,-148.28 7505.59,-148.28 ; 7555.59,451.72 7655.59,551.72 ; 7555.59,1301.72 7655.59,1401.72 ; 7555.59,1901.72 7655.59,2001.72 ; 7605.59,-148.28 7655.59,-98.28 ; 7605.59,-48.28 7505.59,-148.28 ; 7605.59,451.72 7705.59,551.72 ; 7605.59,1301.72 7705.59,1401.72 ; 7605.59,1901.72 7655.59,1951.72 ; 7605.59,2001.72 7505.59,1901.72 7505.59,2001.72 7655.59,2001.72 ; 7655.59,451.72 7755.59,551.72 ; 7655.59,1301.72 7755.59,1401.72 ; 7655.59,1901.72 7655.59,2001.72 ; 7755.59,451.72 7805.59,501.72 ; 7755.59,1301.72 7805.59,1351.72 ; 5205.59,-198.28 5205.59,2051.72 ; 6305.59,-48.28 6305.59,1901.72 ; 6155.59,501.72 6205.59,551.72 6155.59,501.72 ; 6155.59,1351.72 6205.59,1401.72 6155.59,1351.72 ; 6355.59,451.72 6455.59,551.72 6355.59,451.72 ; 6355.59,1301.72 6455.59,1401.72 6355.59,1301.72 ; 6555.59,451.72 6655.59,551.72 6555.59,451.72 ; 6555.59,1301.72 6655.59,1401.72 6555.59,1301.72 ; 6805.59,451.72 6905.59,551.72 6805.59,451.72 ; 6805.59,1301.72 6905.59,1401.72 6805.59,1301.72 ; 7055.59,451.72 7155.59,551.72 7055.59,451.72 ; 7055.59,1301.72 7155.59,1401.72 7055.59,1301.72 ; 7205.59,451.72 7305.59,551.72 7205.59,451.72 ; 7205.59,1301.72 7305.59,1401.72 7205.59,1301.72 ; 7255.59,451.72 7355.59,551.72 7255.59,451.72 ; 7255.59,1301.72 7355.59,1401.72 7255.59,1301.72 ; 7405.59,451.72 7505.59,551.72 7405.59,451.72 ; 7405.59,1301.72 7505.59,1401.72 7405.59,1301.72 ; 7455.59,451.72 7555.59,551.72 7455.59,451.72 ; 7455.59,1301.72 7555.59,1401.72 7455.59,1301.72
  text "Board name: Senoko PVT1A" at 5705.59,3001.72 h39.37
  text "Contact: bunnie@kosagi.com" at 5705.59,2901.72 h39.37
  text "No impedance control requirement" at 6700.79,2283.46 h30
  text "Silk: white" at 6707.2,2212.47 h30
  text "Soldermask: matte black" at 6702.28,2153.42 h30
  text "Material and thickness" at 5105.59,2151.72 h50
  text "Finish: Immersion gold" at 6702.28,2100.27 h30
  text "Plate 0.5 oz" at 5705.59,1951.72 h30
  text "Top-bottom pair" at 6305.59,1951.72 h30 r45
  text "Copper 1.0 oz" at 5705.59,1901.72 h30
  text "Total 1.5 oz" at 5705.59,1841.72 h30
  text "Prepreg" at 5305.59,1501.72 h30
  text "FR-4 0.1mm" at 5705.59,1501.72 h30
  text "Copper 1 oz" at 5705.59,1351.72 h30
  text "Plane" at 7955.59,1351.72 h30
  text "0.035mm" at 5825.59,1301.72 h30
  text "Core" at 5305.59,901.72 h30
  text "FR-4 height as needed to meet overall height spec" at 5705.59,901.72 h30
  text "Overall height: 1.58mm +/-10%" at 5155.59,701.72 h30 r90
  text "Copper 1 oz" at 5705.59,501.72 h30
  text "0.035mm" at 5825.59,451.72 h30
  text "Plane" at 7955.59,451.72 h30
  text "Prepreg" at 5305.59,301.72 h30
  text "FR-4 0.1mm" at 5705.59,301.72 h30
  text "Copper 1.0 oz" at 5705.59,-98.28 h30
  text "Finish: Immersion gold" at 6705.24,-133.98 h30
  text "Plate 0.5 oz" at 5705.59,-148.28 h30
  text "Soldermask: green" at 6700.31,-196.98 h30
  text "Total 1.5oz" at 5711.85,-210.01 h30
  text "Silk: white" at 6705.24,-259.97 h30
  text "Mech via: 10 mil hole / 20 mil pad smallest" at 5699.68,-343.16 h30
  text "Route: 6mil / 6mil smallest" at 5699.68,-443.16 h30
Drill Drawing:
  text ".LEGEND" at 5300.39,50.39 h60
  text "Drill Drawing." at 5300.39,-49.61 h60

## Dimensions
-137.8,1614.17 to 4763.78,1614.17 on Mechanical 3
-137.8,0 to 0,1614.17 on Mechanical 3